# Altium PCB Main_PCB.PcbDoc (part 2 of 2)
Units mm, origin at the board's own origin, x right, y up, seen from the top; angles counter-clockwise.
Board outline 103.42 x 51.99 mm, 4 copper layers (Top Layer, Int1 (GND), Int2 (PWR), Bottom Layer), stack 1.586 mm thick; 103 components, 74 nets, 357 pads, 275 vias.
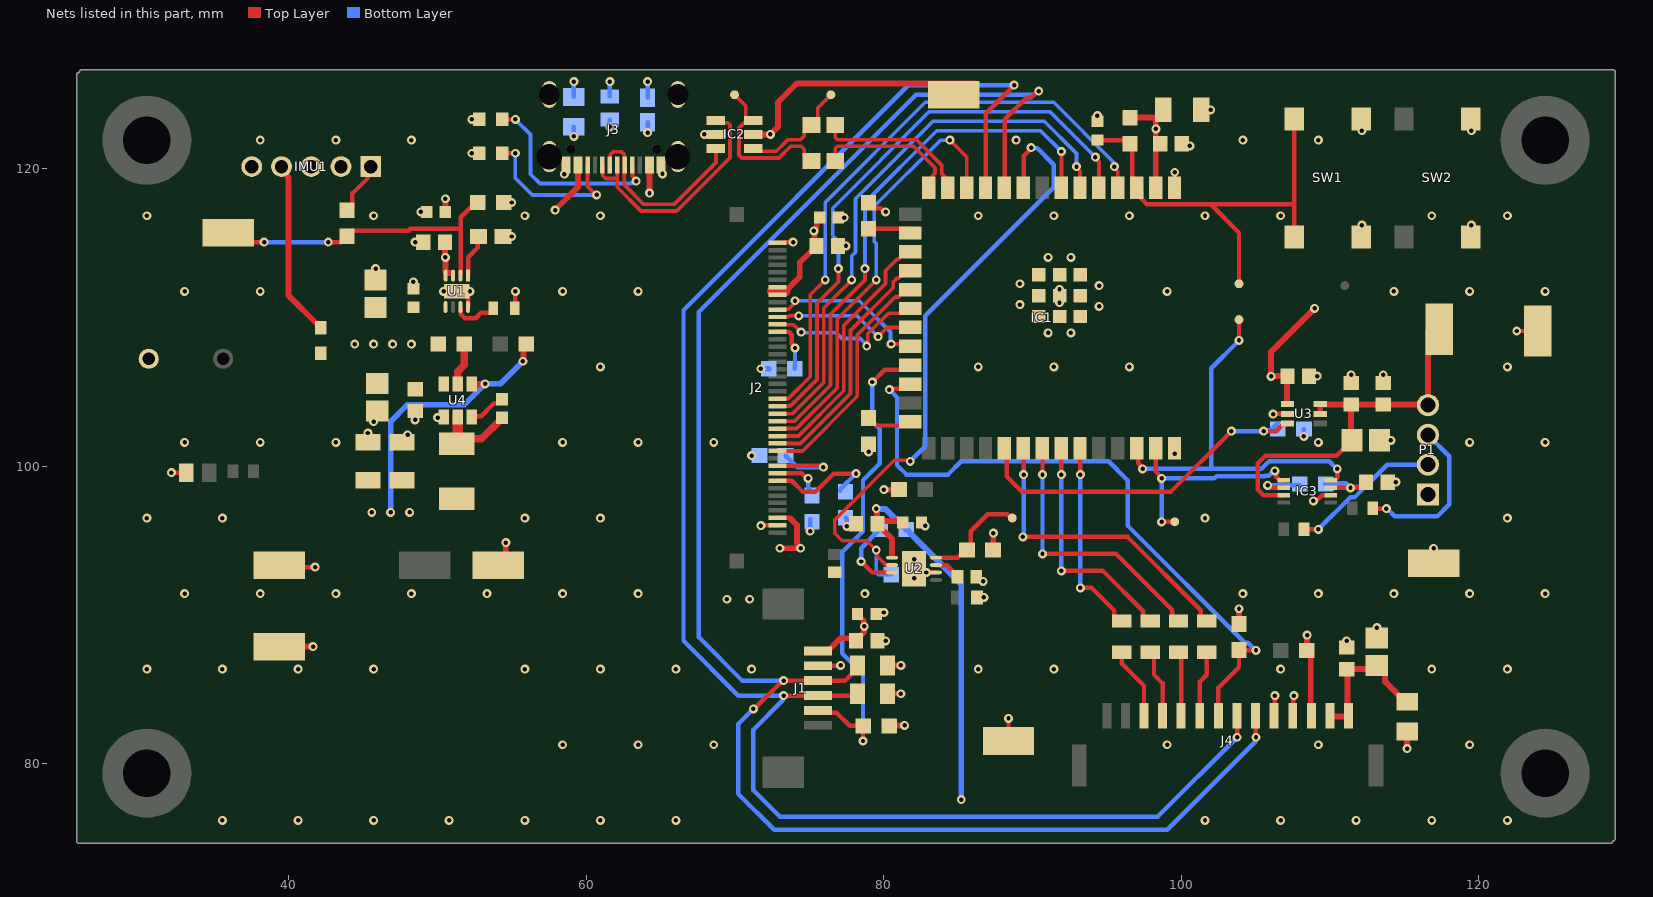
[diagram p4: the nets of this part, all layers, seen from the top]

## Via types
v1: diameter 0.6, hole 0.3, Top Layer to Bottom Layer, 275 vias

## Nets (pads, with @x,y where several pads share a name; then routed paths per layer and width w, separated by ;. In a path a pad name is that pad's centre, name@x,y a point inside that pad or via, vN(x,y) a via of type N, cw(c..) or ccw(c..) an arc to the next point about the centre after c; other vN are vias at no path point) (continued)
GND: C1.1 C2.2 C3.2 C4.1 C5.2 C6.2 C7.2 C8.1 C9.2 C10.1 C11.2 C12.2 C13.2 C14.1 C15.2 C16.1 C17.2 C18.2 C19.1 C21.1 C22.2 C23.1 C24.1 C25.2 C26.2 C27.2 C28.1 C29.1 IC1.1 IC1.40 IC1.41 IC1.42 IC1.43 IC1.44 IC1.45 IC1.46 IC1.47 IC1.48 IC1.49 IC2.2 IC3.2 IMU1.5 J1.2 J2.1 J2.39 J3.A1-B12 J3.B1-A12 J4.4 J4.5 LS1.2 P1.1 R2.1 R3.1 R10.2 R11.1 R12.2 R13.2 R16.2 R17.2 R19.2 R21.2 R23.2 R25.2 R31.2 R40.2 SW1.B1 SW1.B2 SW2.B1 SW2.B2 TP9.1 TP11.1 TP14.1 TP16.1 U1.8 U1.9 U2.6 U2.9 U3.2 U4.4 | length 51.8
  Top Layer w0.3: v1(32.131,99.568) 32.792,99.568 33.006,99.782 R40.2@33.006,99.822 ; TP9.1@39.37,93.345 39.497,93.218 v1(41.783,93.218) ; C27.2@45.339,101.606 v1(45.339,102.235) ; v1(45.72,102.997) 45.72,103.468 C26.2@45.974,103.722 ; C7.2@45.847,112.526 v1(45.847,113.284) ; C22.2@47.625,101.606 48.006,101.987 v1(48.006,102.108) ; C5.2@48.387,111.935 v1(48.387,112.395) ; v1(48.514,103.124) C23.1@48.514,103.725 ; v1(48.514,115.062) C4.1@49.059,115.062 ; v1(48.895,117.094) C6.2@49.284,117.094 ; v1(50.024,103.265) 50.366,103.265 U4.4@50.424,103.323 ; v1(50.419,111.76) U1.9@51.308,111.76 v1(52.197,111.76) ; U1.8@52.078,110.707 U1.9@52.078,111.56 ; v1(52.324,121.038) 52.578,121.038 52.705,120.911 52.817,121.024 R13.2@52.817,121.038 ; v1(52.324,123.31) 52.81,123.31 R10.2@52.817,123.317 ; C3.2@54.421,115.443 v1(54.991,115.443) ; R2.1@54.471,117.729 v1(54.991,117.729) ; R3.1@55.245,110.617 R3.1@55.208,110.617 55.227,110.636 55.227,111.742 v1(55.245,111.76) ; v1(58.547,119.634) 58.598,119.685 58.598,120.186 J3.B1-A12@58.649,120.237 ; J3.A1-B12@65.049,120.237 65.1,120.186 65.1,119.685 v1(65.137,119.648) ; v1(67.945,122.301) IC2.2@68.727,122.301 ; v1(71.755,96.012) 71.776,96.033 72.792,96.033 J2.39@72.876,96.033 ; J2.1@72.876,115.033 73.377,115.033 73.406,115.062 v1(73.914,115.062) ; J1.2@75.597,86.59 75.609,86.602 77.092,86.602 v1(77.104,86.614) ; C16.1@76.925,114.808 v1(77.47,114.808) ; C17.2@76.954,116.713 v1(77.343,116.713) ; v1(77.527,95.955) 77.831,95.955 C8.1@78.015,96.139 ; v1(78.994,100.965) R12.2@78.994,101.485 ; R19.2@78.994,117.717 78.994,117.693 79.35,117.337 79.812,117.337 80.056,117.094 v1(80.137,117.094) ; C2.2@79.494,90.043 79.621,90.17 v1(80.01,90.17) ; C1.1@79.592,88.265 v1(80.137,88.265) ; U2.9@82.042,93.11 82.292,92.86 v1(82.867,92.86) ; C9.2@82.542,96.139 82.684,95.997 v1(82.789,95.997) ; v1@82.951,92.944 82.951,92.914 83.006,92.86 U2.6@83.517,92.86 ; C11.2@86.223,92.583 86.223,92.533 86.473,92.283 86.674,92.283 v1(86.688,92.268) ; R17.2@86.233,91.059 R17.2@86.273,91.099 ; R17.2@86.273,91.186 R17.2@86.273,91.099 ; v1(86.741,91.186) 86.36,91.186 R17.2@86.273,91.099 ; TP14.1@88.392,81.534 v1(88.392,83.058) ; v1(91.821,110.998) IC1.41@91.821,111.474 ; C15.2@94.361,123.182 v1(94.361,123.571) ; IC1.1@99.548,118.986 99.568,119.006 v1(99.568,119.761) ; v1(99.568,100.845) IC1.40@99.568,101.466 ; C10.1@100.039,121.793 100.293,121.539 v1(100.584,121.539) ; C12.2@101.352,123.952 v1(101.981,123.952) ; v1(106.172,103.511) 106.177,103.516 107.141,103.516 U3.2@107.146,103.521 ; J4.5@106.249,83.241 106.274,83.266 106.274,84.557 v1(106.299,84.582) ; J4.4@107.499,83.241 107.534,83.276 107.534,84.547 v1(107.569,84.582) ; C24.1@108.59,106.011 108.64,106.061 v1(109.135,106.061) ; v1(108.881,97.679) 108.938,97.736 109.145,97.736 109.472,98.064 IC3.2@110.042,98.064 ; C21.1@111.125,87.81 v1(111.125,88.265) ; C19.1@111.421,105.606 v1(111.421,106.151) ; SW1.B1@112.109,115.405 112.141,115.437 v1(112.141,116.205) ; SW1.B2@112.109,123.355 112.141,123.323 v1(112.141,122.555) ; v1(113.157,89.154) 113.157,88.646 113.158,88.645 C25.2@113.158,88.466 ; C18.2@113.329,101.743 v1(114.088,101.743) ; C28.1@113.58,105.606 v1(113.58,106.151) ; C29.1@113.882,98.933 v1(114.427,98.933) ; TP16.1@116.967,93.472 v1(116.967,94.488) ; SW2.B1@119.471,115.405 119.471,115.661 119.507,115.697 v1(119.507,116.205) ; SW2.B2@119.471,123.355 119.507,123.319 v1(119.507,122.555) ; v1(122.555,109.093) TP11.1@123.952,109.093
  Bottom Layer w0.3: v1(59.182,122.174) R16.2@59.182,122.825 ; v1(61.595,122.809) R11.1@61.595,123.303 ; v1(64.135,122.428) C14.1@64.135,123.127 ; v1(75.057,95.631) 75.057,96.418 R21.2@75.075,96.436 ; R23.2@77.45,96.532 77.527,96.455 v1(77.527,95.955) ; v1(108.246,102.005) R31.2@108.246,102.505
  other v1: 35.56,76.2 40.64,76.2 45.72,76.2 50.8,76.2 55.88,76.2 60.96,76.2 66.04,76.2 101.6,76.2 106.68,76.2 111.76,76.2 116.84,76.2 121.92,76.2 58.42,81.28 63.5,81.28 68.58,81.28 99.06,81.28 109.22,81.28 119.38,81.28 30.48,86.36 35.56,86.36 40.64,86.36 45.72,86.36 55.88,86.36 60.96,86.36 66.04,86.36 71.12,86.36 86.36,86.36 91.44,86.36 106.68,86.36 116.84,86.36 121.92,86.36 33.02,91.44 38.1,91.44 43.18,91.44 48.26,91.44 53.34,91.44 58.42,91.44 63.5,91.44 78.74,91.44 104.14,91.44 109.22,91.44 114.3,91.44 119.38,91.44 124.46,91.44 82.042,92.485 82.042,93.735 30.48,96.52 35.56,96.52 55.88,96.52 60.96,96.52 101.6,96.52 121.92,96.52 33.02,101.6 38.1,101.6 43.18,101.6 58.42,101.6 63.5,101.6 68.58,101.6 109.22,101.6 119.38,101.6 124.46,101.6 60.96,106.68 86.36,106.68 91.44,106.68 96.52,106.68 121.92,106.68 91.059,108.966 92.583,108.966 94.488,110.744 89.154,110.871 33.02,111.76 38.1,111.76 58.42,111.76 63.5,111.76 99.06,111.76 114.3,111.76 119.38,111.76 124.46,111.76 91.821,111.887 94.488,112.141 89.154,112.268 91.059,114.046 92.583,114.046 30.48,116.84 45.72,116.84 55.88,116.84 60.96,116.84 86.36,116.84 91.44,116.84 96.52,116.84 101.6,116.84 106.68,116.84 116.84,116.84 121.92,116.84 38.1,121.92 43.18,121.92 48.26,121.92 88.9,121.92 104.14,121.92 109.22,121.92
HMI_INT: IC1.24 J4.8 R27.2 | length 44.8
  Top Layer w0.3: v1(80.391,105.156) 80.472,105.156 80.538,105.222 81.488,105.222 IC1.24@81.788,105.522 ; J4.8@102.499,83.241 102.499,85.1 103.886,86.487 R27.2@103.886,87.642 103.898,87.63 v1(105.029,87.63)
  Bottom Layer w0.3: v1(80.391,105.156) 80.899,104.648 80.899,100.076 81.534,99.441 84.328,99.441 85.217,100.33 95.123,100.33 96.393,99.06 96.393,96.012 104.266,88.139 104.478,88.139 104.987,87.63 v1(105.029,87.63)
I2C_SCL: IC1.10 J1.3 J4.6 R15.2 | length 120.1
  Top Layer w0.3: v1(71.247,83.693) 71.31,83.693 73.215,85.598 v1(73.279,85.598) ; v1@73.283,85.594 75.588,85.594 J1.3@75.592,85.59 ; J1.3@75.597,85.59 77.399,85.59 78.248,86.439 R15.2@78.248,86.614 R15.2@78.248,86.693 ; IC1.10@88.118,118.717 88.138,118.737 88.138,123.317 89.597,124.776 89.897,124.776 90.343,125.222 v1(90.424,125.222) ; J4.6@104.999,83.241 104.999,81.927 105.011,81.915 105.029,81.915 v1(105.029,81.788)
  Bottom Layer w0.3: v1(71.247,83.693) 71.247,83.566 71.218,83.595 71.149,83.595 70.231,82.677 70.231,77.978 72.644,75.565 99.06,75.565 104.972,81.477 104.972,81.731 v1(105.029,81.788) ; v1(73.279,85.598) 70.485,85.598 67.564,88.519 67.564,110.363 82.169,124.968 90.098,124.968 90.352,125.222 v1(90.424,125.222)
I2C_SDA: IC1.11 J1.4 J4.7 R20.2 | length 115.9
  Top Layer w0.3: v1(73.279,84.582) 73.287,84.59 J1.4@75.592,84.59 77.898,84.59 78.248,84.94 R20.2@78.248,84.963 ; IC1.11@86.848,118.717 86.868,118.737 86.868,123.698 88.773,125.603 v1(88.773,125.618) ; J4.7@103.749,83.241 103.754,83.236 103.754,81.793 v1(103.759,81.788)
  Bottom Layer w0.3: v1(88.773,125.618) 88.758,125.603 81.661,125.603 66.548,110.49 66.548,88.265 70.231,84.582 v1(73.279,84.582) 73.222,84.525 73.222,84.271 71.247,82.296 71.247,78.232 73.025,76.454 98.425,76.454 v1(103.759,81.788)
IO45: IC1.26 R12.1 | length 3.1
  Top Layer w0.25: R12.1@78.994,103.239 78.994,103.215 79.375,102.834 79.43,102.834 79.522,102.743 81.549,102.743 IC1.26@81.788,102.982
IO46: IC1.16 R19.1 | length 2.9
  Top Layer w0.3: R19.1@78.867,115.963 78.879,115.951 IC1.16@81.788,115.951
LCD_BL_PWM: IC1.9 R25.1 U2.2 | length 44
  Top Layer w0.25: U2.2@80.567,93.36 80.156,93.36 79.569,93.946 79.569,94.294 v1(79.502,94.361) 78.867,94.996 77.216,94.996 76.708,95.504 76.708,96.393 80.712,100.397 81.721,100.397 v1(81.788,100.33)
  Top Layer w0.3: IC1.9@89.388,118.717 89.408,118.737 89.408,120.859 89.916,121.367 v1(89.916,121.412)
  Bottom Layer w0.25: v1(79.502,94.361) 79.502,92.856 79.648,92.71 R25.1@80.518,92.71
  Bottom Layer w0.3: v1(81.788,100.33) 82.804,101.346 82.804,110.109 91.44,118.745 91.44,120.269 90.337,121.372 89.956,121.372 v1(89.916,121.412)
LCD_CS: IC1.22 J2.10 | length 10.9
  Top Layer w0.25: J2.10@72.876,110.533 72.901,110.558 73.611,110.558 73.974,110.921 73.974,111.058 v1(74.041,111.125) ; v1(80.503,108.219) 81.631,108.219 IC1.22@81.788,108.062
  Bottom Layer w0.25: v1(74.041,111.125) 78.354,111.125 80.46,109.019 80.46,108.262 v1(80.503,108.219)
LCD_D0: IC1.4 J2.22 | length 40.6
  Top Layer w0.25: J2.22@72.876,104.533 72.901,104.558 73.611,104.558 75.075,106.022 75.075,111.524 v1(76.073,112.522) ; v1(95.504,120.142) 95.504,120.068 95.738,119.834 IC1.4@95.738,118.717
  Bottom Layer w0.25: v1(76.073,112.522) 76.073,117.729 82.804,124.46 91.435,124.46 95.437,120.458 95.437,120.209 v1(95.504,120.142)
LCD_D1: IC1.5 J2.23 | length 39.4
  Top Layer w0.25: J2.23@72.876,104.033 73.601,104.033 73.651,104.083 73.772,104.083 75.525,105.836 75.525,110.963 76.962,112.4 v1(76.962,113.284) ; v1(94.234,120.777) 94.234,120.682 94.468,120.448 IC1.5@94.468,118.717
  Bottom Layer w0.25: v1(76.962,113.284) 76.962,114.248 76.845,114.365 76.845,115.234 76.581,115.498 76.581,117.348 83.058,123.825 91.186,123.825 v1(94.234,120.777)
LCD_D2: IC1.6 J2.24 | length 37.5
  Top Layer w0.25: J2.24@72.876,103.533 73.874,103.533 75.975,105.634 75.975,110.646 v1(77.851,112.522) ; v1(92.964,120.142) 92.964,120.068 93.198,119.834 IC1.6@93.198,118.717
  Bottom Layer w0.25: v1(77.851,112.522) 77.851,114.132 78.105,114.386 78.105,117.983 83.312,123.19 90.8,123.19 92.964,121.026 v1(92.964,120.142)
LCD_D3: IC1.7 J2.25 | length 36
  Top Layer w0.25: J2.25@72.876,103.033 74.01,103.033 76.425,105.447 76.425,110.212 78.74,112.527 v1(78.74,113.284) ; IC1.7@91.928,118.717 91.948,118.737 v1(91.948,121.158)
  Bottom Layer w0.25: v1(78.74,113.284) 78.74,117.729 83.566,122.555 90.551,122.555 v1(91.948,121.158)
LCD_D4: IC1.12 J2.26 | length 29.1
  Top Layer w0.25: J2.26@72.876,102.533 74.147,102.533 76.875,105.261 76.875,109.895 v1(79.502,112.522) ; v1(84.455,121.92) 85.578,120.797 IC1.12@85.578,118.717
  Bottom Layer w0.25: v1(79.502,112.522) 79.502,114.982 79.375,115.109 79.375,117.475 83.82,121.92 v1(84.455,121.92)
LCD_D5: IC1.17 J2.27 | length 17.1
  Top Layer w0.25: J2.27@72.876,102.033 74.283,102.033 77.325,105.075 77.325,109.461 80.127,112.263 80.127,113.14 80.903,113.917 80.993,113.917 81.488,114.412 IC1.17@81.788,114.412
LCD_D6: IC1.18 J2.28 | length 16.4
  Top Layer w0.25: J2.28@72.876,101.533 74.419,101.533 77.775,104.888 77.775,109.128 80.645,111.999 80.645,112.388 80.903,112.647 81.017,112.647 81.163,112.793 81.163,112.817 81.488,113.142 IC1.18@81.788,113.142
LCD_D7: IC1.19 J2.29 | length 15.8
  Top Layer w0.25: J2.29@72.876,101.033 74.556,101.033 78.225,104.702 78.225,108.828 80.776,111.379 80.995,111.379 81.488,111.872 IC1.19@81.788,111.872
LCD_DC: IC1.21 J2.11 | length 9.8
  Top Layer w0.25: J2.11@72.876,110.033 72.901,110.058 73.611,110.058 73.662,110.109 v1(74.295,110.109) ; v1(79.629,108.712) 80.249,109.332 IC1.21@81.788,109.332
  Bottom Layer w0.25: v1(74.295,110.109) 78.232,110.109 v1(79.629,108.712)
LCD_IM0: J2.31 R7.2 | length 6
  Top Layer w0.3: J2.31@72.876,100.033 75.781,100.033 75.865,99.949 v1(75.946,99.949)
  Bottom Layer w0.3: R7.2@73.406,100.711 73.429,100.711 74.191,99.949 v1(75.946,99.949)
LCD_IM1: J2.32 R21.1 | length 3.2
  Top Layer w0.3: J2.32@72.876,99.533 74.503,99.533 74.849,99.187 v1(74.93,99.187)
  Bottom Layer w0.3: v1(74.93,99.187) 74.93,98.552 R21.1@75.184,98.298
LCD_IM2: J2.33 R23.1 | length 7.7
  Top Layer w0.3: J2.33@72.876,99.033 73.814,99.033 74.549,98.298 75.438,98.298 76.649,99.509 v1(78.143,99.509)
  Bottom Layer w0.3: R23.1@77.089,98.367 77.089,98.455 v1(78.143,99.509)
LCD_RDX: J2.13 R5.2 | length 3.4
  Top Layer w0.3: J2.13@72.876,109.033 73.621,109.033 73.826,108.828 73.826,108.246 74.041,108.031 v1(74.041,107.95)
  Bottom Layer w0.3: R5.2@74.029,106.553 74.029,106.795 74.041,106.807 v1(74.041,107.95)
LCD_WR: IC1.20 J2.12 | length 11
  Top Layer w0.25: J2.12@72.876,109.533 72.894,109.515 73.946,109.515 v1(74.45,109.011) ; v1(78.867,108.077) 78.934,108.144 78.934,108.901 80.31,110.277 81.463,110.277 IC1.20@81.788,110.602
  Bottom Layer w0.25: v1(74.45,109.011) 74.495,108.966 76.835,108.966 77.208,108.593 78.428,108.593 78.867,108.154 v1(78.867,108.077)
LED_BLANK: IC1.35 R37.2 | length 13.3
  Top Layer w0.3: IC1.35@93.198,101.217 93.218,101.197 v1(93.218,99.441) ; v1(93.218,91.821) 93.98,91.821 95.512,90.289 95.512,89.903 95.812,89.603 R37.2@96.012,89.603
  Bottom Layer w0.3: v1(93.218,91.821) v1(93.218,99.441)
LED_BLANK_HMI: J4.12 R37.1 | length 4.9
  Top Layer w0.3: R37.1@96.012,87.503 96.012,86.741 97.499,85.254 J4.12@97.499,83.241
LED_LAT: IC1.34 R34.2 | length 15.8
  Top Layer w0.3: IC1.34@91.928,101.217 91.928,100.858 91.948,100.838 v1(91.948,99.441) ; v1(91.948,92.964) 94.742,92.964 97.442,90.264 97.442,89.903 97.742,89.603 R34.2@97.917,89.603
  Bottom Layer w0.3: v1(91.948,92.964) v1(91.948,99.441)
LED_LAT_HMI: J4.11 R34.1 | length 4.6
  Top Layer w0.3: R34.1@97.917,87.503 98.171,87.249 98.171,85.979 98.749,85.401 J4.11@98.749,83.241
LED_SCLK: IC1.33 R33.2 | length 18.4
  Top Layer w0.3: IC1.33@90.658,101.217 90.678,101.197 v1(90.678,99.441) ; v1(90.678,94.107) 95.631,94.107 99.411,90.327 99.411,89.903 99.711,89.603 R33.2@99.822,89.603
  Bottom Layer w0.3: v1(90.678,94.107) v1(90.678,99.441)
LED_SCLK_HMI: J4.10 R33.1 | length 4.3
  Top Layer w0.3: R33.1@99.822,87.503 99.999,87.326 J4.10@99.999,83.241
LED_SIN: IC1.32 R32.2 | length 20.9
  Top Layer w0.3: v1(89.362,95.25) 96.393,95.25 101.316,90.327 101.316,89.903 101.616,89.603 R32.2@101.727,89.603 ; IC1.32@89.388,101.217 89.408,101.197 v1(89.408,99.441)
  Bottom Layer w0.3: v1(89.362,95.25) 89.408,95.296 v1(89.408,99.441)
LED_SIN_HMI: J4.9 R32.1 | length 4.5
  Top Layer w0.3: J4.9@101.249,83.241 101.249,85.501 101.727,85.979 R32.1@101.727,87.503
MCU_EN: C15.1 IC1.3 R6.2 SW1.A1 SW1.A2 TP12.1 | length 30.5
  Top Layer w0.3: C15.1@94.361,121.928 96.321,121.928 R6.2@96.571,121.678 ; R6.2@96.499,121.606 96.708,121.397 96.708,119.286 IC1.3@97.008,118.986 ; IC1.3@97.008,118.717 97.308,118.417 97.308,117.992 97.698,117.602 101.981,117.602 ; TP12.1@103.886,112.268 103.886,115.697 101.981,117.602 ; SW1.A1@107.609,115.405 107.609,117.562 ; SW1.A2@107.609,123.355 107.609,117.562 ; 101.981,117.602 107.569,117.602 107.609,117.562
MCU_SCAN_RX: IC1.38 IC3.4 TP15.1 | length 27
  Top Layer w0.3: IC1.38@97.008,101.217 97.12,101.105 97.12,100.192 97.409,99.903 v1(97.409,99.822) ; v1(103.886,108.458) TP15.1@103.886,109.855 ; IC3.4@110.042,99.064 110.317,99.064 110.49,99.237 v1(110.49,99.822)
  Bottom Layer w0.3: v1(97.409,99.822) 97.424,99.837 102.015,99.837 ; v1(103.886,108.458) 102.015,106.587 102.015,99.837 ; v1(110.49,99.822) 110.475,99.822 109.952,100.345 105.903,100.345 105.395,99.837 102.015,99.837
MCU_SCAN_TX: IC1.39 IC3.5 TP17.1 | length 14.9
  Top Layer w0.3: IC1.39@98.278,101.217 98.298,101.197 98.298,99.649 98.679,99.268 v1(98.679,99.187) ; v1(98.679,96.266) TP17.1@99.568,96.266 ; v1(106.299,99.695) 106.356,99.638 106.356,99.325 106.617,99.064 IC3.5@106.892,99.064
  Bottom Layer w0.3: v1(98.679,96.266) v1(98.679,99.187) 102.235,99.187 102.385,99.337 105.602,99.337 105.629,99.364 105.887,99.364 106.218,99.695 v1(106.299,99.695)
NetC3_1: C3.1 U1.1 | length 2.8
  Top Layer w0.3: U1.1@52.08,112.813 52.08,113.929 ; 52.08,114.056 52.705,114.681 52.705,115.381 C3.1@52.767,115.443
NetC20_1: C20.1 L1.1 U4.5 | length 5.5
  Top Layer w0.3: L1.1@51.308,101.519 L1.1@51.643,101.854 ; C20.1@54.356,103.239 C20.1@54.356,103.261
  Top Layer w0.5: L1.1@51.643,101.854 52.971,101.854 C20.1@54.356,103.239
  Top Layer w0.7: L1.1@51.374,101.585 51.374,101.854 U4.5@51.374,103.323
NetC20_2: C20.2 U4.6 | length 2.5
  Top Layer w0.3: U4.6@52.324,103.323 52.368,103.367 52.948,103.367 53.815,104.234 54.1,104.234 C20.2@54.356,104.49
NetR3_2: R3.2 U1.7 | length 3.1
  Top Layer w0.3: U1.7@51.558,110.707 51.558,110.476 51.58,110.454 51.58,110.234 51.86,109.954 52.58,109.954 52.943,110.317 53.583,110.317 53.758,110.492 R3.2@53.758,110.617
NetR29_1: R29.1 U4.2 | length 2.9
  Top Layer w0.5: U4.2@51.374,105.522 51.374,106.365 51.816,106.807 R29.1@51.816,108.204
OE: IC3.6 R38.2 | length 3.3
  Top Layer w0.3: v1(105.806,98.714) 105.887,98.714 106.037,98.564 IC3.6@106.892,98.564
  Bottom Layer w0.3: v1(105.806,98.714) R38.2@107.962,98.714
PWR_LED: IMU1.4 R26.2 | length 12
  Top Layer w0.4: IMU1.4@39.529,120.142 39.529,119.884 40.005,119.408 40.005,111.467 41.914,109.558 41.964,109.558 42.164,109.358 R26.2@42.164,109.308
PWR_SW_NC: IMU1.3
SCAN_RX_TO_MODULE: P1.2 R35.2 | length 10.1
  Top Layer w0.3: R35.2@108.261,95.774 108.277,95.758 v1(109.22,95.758)
  Bottom Layer w0.3: v1(109.22,95.758) 111.364,97.902 111.648,97.902 113.854,100.108 P1.2@116.586,100.108
SCAN_TX_FROM_MODULE: P1.3 R36.2 | length 11
  Top Layer w0.3: R36.2@112.87,97.171 112.886,97.155 v1(113.792,97.155)
  Bottom Layer w0.3: v1(113.792,97.155) 113.837,97.155 114.345,96.647 117.221,96.647 118.025,97.451 118.025,100.669 P1.3@116.586,102.108
SCANNER_5V: C18.1 C19.2 C28.2 IC3.7 P1.4 TP6.1 U3.5 U3.6 | length 26.1
  Top Layer w0.3: IC3.7@106.892,98.064 105.507,98.064 105.332,98.24 105.332,98.249 105.156,98.425 105.156,100.203 105.664,100.711 110.444,100.711 110.872,101.139 110.924,101.139 111.476,101.692 C18.1@111.476,101.743
  Top Layer w0.4: U3.5@109.346,103.521 U3.6@109.346,104.171 ; U3.6@109.374,104.171 109.389,104.156 C19.2@111.421,104.156 ; C18.1@111.476,101.743 111.421,101.798 C19.2@111.421,104.156 ; TP6.1@116.713,109.22 116.586,109.093 P1.4@116.586,104.108 116.538,104.156 C28.2@113.58,104.156 C19.2@111.421,104.156
SCANNER_PWR_EN: IC1.31 R31.1 U3.3 | length 24.3
  Top Layer w0.3: IC1.31@88.118,101.217 88.265,101.07 88.265,99.314 89.281,98.298 99.314,98.298 v1(103.378,102.362) ; v1(105.537,102.362) 106.387,102.362 106.846,102.821 107.096,102.821 U3.3@107.146,102.871
  Bottom Layer w0.3: v1(103.378,102.362) v1(105.537,102.362) 105.594,102.419 106.014,102.419 R31.1@106.48,102.886
STC_DISC: R22.2 TP13.1 U2.8 | length 6.9
  Top Layer w0.3: U2.8@83.517,93.86 84.97,93.86 85.115,94.005 85.219,94.005 85.471,94.257 85.471,94.361 R22.2@85.598,94.361 85.852,94.615 85.852,95.631 86.995,96.774 88.32,96.774 TP13.1@88.483,96.611
STC_EN: R4.2 U2.3 | length 5.1
  Top Layer w0.3: v1(78.486,93.599) 79.225,92.86 U2.3@80.567,92.86
  Bottom Layer w0.3: v1(78.486,93.599) 78.486,94.499 79.745,95.758 R4.2@79.768,95.758
STC_SLOPE: C11.1 U2.7 | length 1.8
  Top Layer w0.3: U2.7@83.517,93.36 84.246,93.36 84.963,92.643 84.963,92.583 C11.1@84.973,92.583
SYS_3V3: C1.2 C2.1 C10.2 C12.1 C16.2 C17.1 C22.1 C27.1 C29.2 IC1.2 IC3.3 J1.1 J2.7 J2.8 J4.3 L1.2 R1.2 R5.1 R6.1 R7.1 R8.1 R9.1 R15.1 R20.1 R22.1 R27.1 R28.1 R38.1 TP5.1 U4.1 | length 55.5
  Top Layer w0.3: IC3.3@110.042,98.564 111.367,98.564 v1(111.379,98.552)
  Top Layer w0.381: U4.1@52.324,105.522 52.331,105.53 53.206,105.53 v1(53.213,105.537) ; TP5.1@54.102,93.345 54.61,93.853 v1(54.61,94.869) ; v1(55.753,107.061) 55.795,107.103 55.795,108.015 R1.2@55.983,108.204 ; 73.405,111.76 74.358,112.713 74.358,113.691 75.14,114.473 75.19,114.473 75.475,114.758 C16.2@75.475,114.808 75.353,114.93 75.353,115.782 v1(75.311,115.824) 75.311,115.883 75.511,116.084 75.511,116.524 C17.1@75.7,116.713 ; J1.1@75.597,87.59 75.779,87.59 75.819,87.63 76.287,87.63 77.095,88.438 77.857,88.438 C1.2@77.895,88.475 ; C1.2@78.153,88.563 78.39,88.563 78.698,88.871 v1(78.698,89.239) 78.656,89.281 78.656,89.638 C2.1@78.251,90.043 ; v1(80.01,98.425) R8.1@81.038,98.425 ; R20.1@80.248,84.709 v1(81.153,84.709) ; R15.1@80.248,86.614 v1(81.153,86.614) ; R9.1@80.379,82.578 v1(81.407,82.578) ; R22.1@87.351,94.361 87.364,94.373 87.364,95.492 v1(87.376,95.504) ; R6.1@96.571,123.432 96.635,123.432 96.647,123.444 C12.1@98.437,123.444 ; IC1.2@98.278,118.986 98.288,118.996 98.288,121.91 C10.2@98.298,121.92 ; C12.1@98.298,123.45 98.298,122.084 C10.2@98.589,121.793 ; C12.1@98.408,123.561 C12.1@98.8,123.952 ; R27.1@103.886,89.396 v1(103.886,90.424) ; R28.1@108.446,87.63 108.452,87.636 108.452,88.64 v1(108.458,88.646) ; R28.1@108.712,87.63 108.712,83.278 J4.3@108.749,83.241 ; v1(111.379,98.552) 111.438,98.552 111.485,98.598 112.147,98.598 112.202,98.653 C29.2@112.202,98.832
  Top Layer w0.7: 72.517,111.76 73.405,111.76
  Bottom Layer w0.381: v1(46.863,96.901) 46.863,102.997 48.006,104.14 51.816,104.14 v1(53.213,105.537) 54.229,105.537 v1(55.753,107.061) ; v1(71.755,106.553) R5.1@72.275,106.553 ; R38.1@109.716,98.806 111.066,98.806 111.32,98.552 v1(111.379,98.552)
  other v1: 45.593,96.901 48.133,96.901 71.12,100.711 98.298,122.682
SYS_5V: C5.1 C7.1 C8.2 C9.1 C23.2 C24.2 C26.1 J2.38 R4.1 R26.1 R29.2 R30.1 TP2.1 U1.5 U2.1 U3.1 U4.3 | length 44.5
  Top Layer w0.3: J2.38@72.876,96.533 73.647,96.533
  Top Layer w0.4: TP2.1@39.37,87.884 v1(41.656,87.884) ; v1(73.025,94.488) v1(74.422,94.488) 74.422,94.542 74.168,94.796 74.168,96.057 73.729,96.496 ; v1(79.502,97.155) 79.54,97.117 79.54,96.464 79.562,96.442 79.794,96.442 79.909,96.328 81.109,96.328 81.161,96.275 C9.1@81.161,96.139 ; C8.2@79.592,96.089 80.567,95.114 U2.1@80.567,93.935 ; C8.2@79.592,96.139 C8.2@79.845,96.392 ; U3.1@107.146,104.171 107.103,104.171 107.103,105.807 107.14,105.844 C24.2@107.14,106.061 107.132,106.053 106.053,106.053 v1(106.045,106.045) 106.045,107.696 v1(108.966,110.617) ; v1(115.189,81.026) R30.1@115.189,82.169
  Bottom Layer w0.4: v1(79.502,97.155) 79.54,97.117 80.14,97.117 81.498,95.758 R4.1@81.522,95.758 ; R4.1@81.545,95.758 81.851,95.452 81.851,95.429 85.217,92.063 v1(85.217,77.597)
  other v1: 69.469,91.059 70.993,91.059 44.45,108.204 45.72,108.204 46.99,108.204 48.26,108.204
SYS_EN: R2.2 R24.2 TP3.1 U1.2 | length 21.6
  Top Layer w0.3: TP3.1@35.941,115.697 36.576,115.062 v1(38.354,115.062) ; v1(42.672,115.062) 43.549,115.062 43.563,115.076 43.586,115.076 43.942,115.432 43.942,115.479 44.298,115.835 48.07,115.835 48.187,115.951 51.58,115.951 ; U1.2@51.58,112.94 51.58,115.951 ; R2.2@52.717,117.729 52.361,117.373 52.222,117.373 51.58,116.731 51.58,115.951
  Bottom Layer w0.3: v1(38.354,115.062) v1(42.672,115.062)
SYS_EN_SW: IMU1.1 R24.1 | length 3.6
  Top Layer w0.3: R24.1@43.942,117.209 44.298,117.565 44.298,118.339 45.339,119.38 45.339,119.952 IMU1.1@45.529,120.142
TOUCH_INT: IC1.23 J1.5 R9.2 | length 33.5
  Top Layer w0.3: J1.5@75.597,83.59 75.668,83.59 75.818,83.44 76.834,83.44 77.724,82.55 R9.2@78.625,82.55 78.613,82.538 v1(78.613,81.534) ; v1(79.248,105.664) 80.076,106.492 81.488,106.492 IC1.23@81.788,106.792
  Bottom Layer w0.3: v1(78.613,81.534) 78.613,86.024 77.216,87.421 77.216,94.234 78.613,95.631 78.613,99.06 79.749,100.196 79.749,102.496 79.248,102.997 v1(79.248,105.664)
USB_CC1: J3.A5 R10.1 | length 13.6
  Top Layer w0.25: R10.1@54.371,123.29 54.39,123.31 v1(55.245,123.31) ; J3.A5@63.099,120.237 63.124,120.212 63.124,119.499 63.358,119.265 v1(63.358,119.171)
  Bottom Layer w0.25: v1(55.245,123.31) 56.261,122.294 56.261,119.634 56.896,118.999 63.091,118.999 63.263,119.171 v1(63.358,119.171)
USB_CC2: J3.B5 R13.1 | length 10.7
  Top Layer w0.25: J3.B5@60.099,120.237 60.099,118.813 60.675,118.237 v1(60.706,118.237)
  Top Layer w0.3: R13.1@54.371,121.038 v1(55.245,121.038)
  Bottom Layer w0.25: v1(55.245,121.038) 55.245,119.38 56.388,118.237 v1(60.706,118.237)
USB_D_CONN_N: IC2.3 J3.A7 J3.B7 | length 12.7
  Top Layer w0.25: J3.A7@61.599,120.237 61.624,120.262 61.624,120.947 61.814,121.137 62.384,121.137 62.574,120.947 J3.B7@62.574,120.237 ; J3.B7@62.624,120.237 J3.B7@62.599,120.237 J3.B7@62.574,120.237 ; IC2.3@68.727,121.351 68.727,120.417 65.912,117.602 63.881,117.602 62.574,118.909 J3.B7@62.574,120.237
USB_D_CONN_P: IC2.1 J3.A6 J3.B6 | length 16.3
  Top Layer w0.25: J3.B6@61.099,120.237 61.124,120.212 61.124,119.528 61.314,119.337 62.002,119.337 62.099,119.434 ; J3.A6@62.099,120.237 62.099,119.434 ; IC2.1@68.727,123.251 68.887,123.091 69.523,123.091 69.677,122.937 69.677,120.731 66.098,117.152 63.695,117.152 62.099,118.748 62.099,119.434
USB_D_MCU_N: IC1.13 R14.2 | length 10.2
  Top Layer w0.25: R14.2@76.747,122.936 76.747,122.101 76.894,121.954 82.191,121.954 83.898,120.247 83.898,119.696 84.308,119.286 IC1.13@84.308,118.986
USB_D_MCU_P: IC1.14 R18.2 | length 9.4
  Top Layer w0.25: R18.2@76.747,120.523 76.747,121.358 76.894,121.504 82.005,121.504 83.448,120.061 83.448,119.696 83.038,119.286 IC1.14@83.038,118.986
USB_D_PROT_N: IC2.4 R14.1 TP8.1 | length 7.6
  Top Layer w0.25: IC2.4@71.227,121.53 71.227,121.322 71.373,121.176 72.789,121.176 73.567,121.954 74.426,121.954 74.667,122.196 74.667,122.532 75.071,122.936 R14.1@75.145,122.936 ; R14.1@75.565,122.821 75.565,124.079 TP8.1@76.454,124.968
USB_D_PROT_P: IC2.6 R18.1 TP10.1 | length 11.1
  Top Layer w0.25: TP10.1@69.977,124.968 70.739,124.206 IC2.6@70.739,123.076 ; IC2.6@71.227,123.251 71.052,123.076 IC2.6@70.739,123.076 ; R18.1@75.145,120.523 75.071,120.523 74.667,120.927 74.667,121.294 74.457,121.504 73.754,121.504 72.975,120.726 70.467,120.726 70.277,120.916 70.277,122.736 70.617,123.076 IC2.6@70.739,123.076
USB_SHIELD: C14.2 J3.1 J3.2 J3.3 J3.4 R11.2 R16.1 | length 3.1
  Bottom Layer w0.3: R16.1@59.182,124.825 v1(59.182,125.857) ; R11.2@61.595,124.855 v1(61.595,125.857) ; C14.2@64.135,124.777 v1(64.135,125.857)
USB_VBUS: C4.2 C6.1 IC2.5 IMU1.2 J3.A4-B9 J3.B4-A9 TP1.1 U1.3 U1.4 | length 26.2
  Top Layer w0.4: C4.2@50.509,115.062 50.528,115.043 50.528,114.064 v1(50.546,114.046) ; C6.1@50.538,117.094 50.542,117.098 50.542,117.979 v1(50.546,117.983) ; v1@50.552,114.04 50.552,113.066 50.629,112.99 U1.3@50.986,112.99 ; v1(57.912,117.221) 59.449,118.758 J3.B4-A9@59.449,120.237 ; J3.A4-B9@64.249,120.237 64.256,120.231 64.256,118.37 v1(64.262,118.364) ; IC2.5@71.227,122.301 v1(72.39,122.301) 72.898,122.809 72.898,124.46 74.168,125.73 TP1.1@86.106,125.73
VLED_5V: C21.2 C25.1 J4.1 J4.2 R30.2 | length 9.9
  Top Layer w0.4: J4.2@109.999,83.241 110.055,83.185 111.193,83.185 J4.1@111.249,83.241 111.187,83.303 111.187,86.387 111.169,86.404 C21.2@111.125,86.36 112.904,86.36 C25.1@113.158,86.614 ; C25.1@113.337,86.487 113.712,86.111 113.712,85.521 115.064,84.169 R30.2@115.189,84.169
pads on no net: IC1.15 IC1.28 IC1.29 IC1.30 IC1.37 J1.MP1 J1.MP2 J2.2 J2.3 J2.4 J2.5 J2.6 J2.9 J2.14 J2.15 J2.16 J2.17 J2.18 J2.19 J2.20 J2.21 J2.40 J2.MP1 J2.MP2 J3. J3.A8 J3.B8 J4.14 J4.15 J4.16 U3.4

## Polygon pours and split planes (outlines as drawn)
GND on Top Layer "GND_L01_P005" (solid, remove dead copper, pour order 5): 25.908,126.492 25.908,74.803 129.032,74.803 129.032,126.492
USB_SHIELD on Top Layer "USB_SHIELD" (solid, remove dead copper, pour order 3): 56.388,126.492 56.388,119.126 67.056,119.126 67.31,119.38 67.31,126.492
SYS_3V3 on Top Layer "SYS_3V3_L01_P000" (solid, remove dead copper, pour order 0): 43.18,100.33 53.594,100.33 53.594,96.012 43.18,96.012
SYS_5V on Top Layer "SYS_5V_L01_P002" (solid, remove dead copper, pour order 2): 40.767,106.426 40.767,107.298 40.767,108.458 43.053,108.458 43.053,109.347 43.053,111.633 46.863,111.633 47.117,111.379 49.149,111.379 49.403,111.125 50.8,111.125 50.8,104.394 47.371,104.394 47.117,104.648 40.767,104.648
GND on Bottom Layer "GND_L04_P006" (solid, pour order 6): 25.908,126.492 25.908,74.803 129.032,74.803 129.032,126.492
SYS_5V on Bottom Layer "SYS_5V_L04_P004" (solid, pour order 4): 68.453,89.916 71.501,89.916 72.789,91.204 75.311,93.726 75.311,94.615 74.549,95.377 72.644,95.377 71.755,94.488 70.993,93.726 68.453,91.533
USB_VBUS on Int2 (PWR) (split plane): 73.277,126.111 73.277,124.968 73.277,120.437 63.967,111.127 50.909,111.127 50.809,111.177 50.683,111.219 50.552,111.245 50.419,111.254 26.289,111.254 26.268,111.253 26.268,126.079 26.297,126.103 26.321,126.132 73.278,126.132
SYS_5V on Int2 (PWR) (split plane): 128.672,75.217 128.663,75.209 128.643,75.192 128.628,75.173 128.617,75.163 26.268,75.163 26.268,109.219 26.289,109.218 49.401,109.218 49.401,106.555 42.799,106.555 42.666,106.546 42.535,106.52 42.409,106.478 42.29,106.419 42.179,106.345 42.079,106.257 41.991,106.157 41.917,106.046 41.858,105.927 41.816,105.801 41.79,105.67 41.781,105.537 41.781,96.012 41.79,95.879 41.816,95.748 41.858,95.622 41.917,95.503 41.991,95.392 42.079,95.292 45.254,92.117 45.354,92.029 45.465,91.955 45.584,91.896 45.71,91.854 45.841,91.828 45.974,91.819 72.857,91.819 74.039,90.637 74.039,79.375 74.048,79.242 74.074,79.111 74.116,78.985 74.175,78.866 74.249,78.755 74.337,78.655 74.437,78.567 74.548,78.493 74.667,78.434 74.793,78.392 74.924,78.366 75.057,78.357 107.696,78.357 107.829,78.366 107.96,78.392 108.086,78.434 108.205,78.493 108.316,78.567 108.416,78.655 119.084,89.323 120.608,90.847 120.696,90.947 120.77,91.058 120.829,91.177 120.871,91.303 120.897,91.434 120.906,91.567 120.906,104.648 120.897,104.781 120.871,104.912 120.829,105.038 120.77,105.157 120.696,105.268 120.608,105.368 116.417,109.559 116.317,109.647 116.206,109.721 116.087,109.78 115.961,109.822 115.83,109.848 115.697,109.857 107.61,109.857 106.809,110.658 106.809,126.111 106.808,126.132 128.672,126.132
SYS_3V3 on Int2 (PWR) (split plane): 104.773,126.111 104.773,110.236 104.782,110.103 104.808,109.972 104.85,109.846 104.909,109.727 104.983,109.616 105.071,109.516 106.468,108.119 106.568,108.031 106.679,107.957 106.798,107.898 106.924,107.856 107.055,107.83 107.188,107.821 115.275,107.821 118.87,104.226 118.87,91.989 117.644,90.763 107.274,80.393 76.075,80.393 76.075,91.059 76.066,91.192 76.04,91.323 75.998,91.449 75.939,91.568 75.865,91.679 75.777,91.779 73.999,93.557 73.899,93.645 73.788,93.719 73.669,93.778 73.543,93.82 73.412,93.846 73.279,93.855 46.396,93.855 43.817,96.434 43.817,104.519 50.419,104.519 50.552,104.528 50.683,104.554 50.809,104.596 50.928,104.655 51.039,104.729 51.139,104.817 51.227,104.917 51.301,105.028 51.36,105.147 51.402,105.273 51.428,105.404 51.437,105.537 51.437,109.091 64.389,109.091 64.522,109.1 64.653,109.126 64.779,109.168 64.898,109.227 65.009,109.301 65.109,109.389 75.015,119.295 75.103,119.395 75.177,119.506 75.236,119.625 75.278,119.751 75.304,119.882 75.313,120.015 75.313,124.968 75.313,126.111 75.312,126.132 104.774,126.132
GND on Int1 (GND) (split plane): 128.672,75.217 128.663,75.209 128.643,75.192 128.628,75.173 128.617,75.163 26.268,75.163 26.268,126.079 26.297,126.103 26.321,126.132 128.672,126.132

## Other copper
Top Layer:
  text "LUCA GUEBELI / FLATLOG 1.0" at 35.56,77.089 h1.52
Int2 (PWR) (plane layer: these items are gaps in the copper):
  lines w2.032: 26.289,110.236 50.419,110.236 ; 74.295,126.111 74.295,124.968 74.295,120.015 64.389,110.109 50.546,110.109 50.419,110.236 ; 105.791,126.111 105.791,110.236 107.188,108.839 115.697,108.839 119.888,104.648 119.888,91.567 118.364,90.043 107.696,79.375 75.057,79.375 75.057,91.059 73.279,92.837 45.974,92.837 42.799,96.012 42.799,105.537 50.419,105.537 50.419,110.236